# Altium PCB Altium LV Solo mission_PCB.PcbDoc
Units mm, origin at the board's own origin, x right, y up, seen from the top; angles counter-clockwise.
Board outline 34.5 x 34 mm, 4 copper layers (L1(Signal), L2(GND), L3 (GND), Layer4(Signal)), stack 1.57 mm thick; 35 components, 27 nets, 169 pads, 116 vias.
Unrouted connection lines stored in the file: 30.
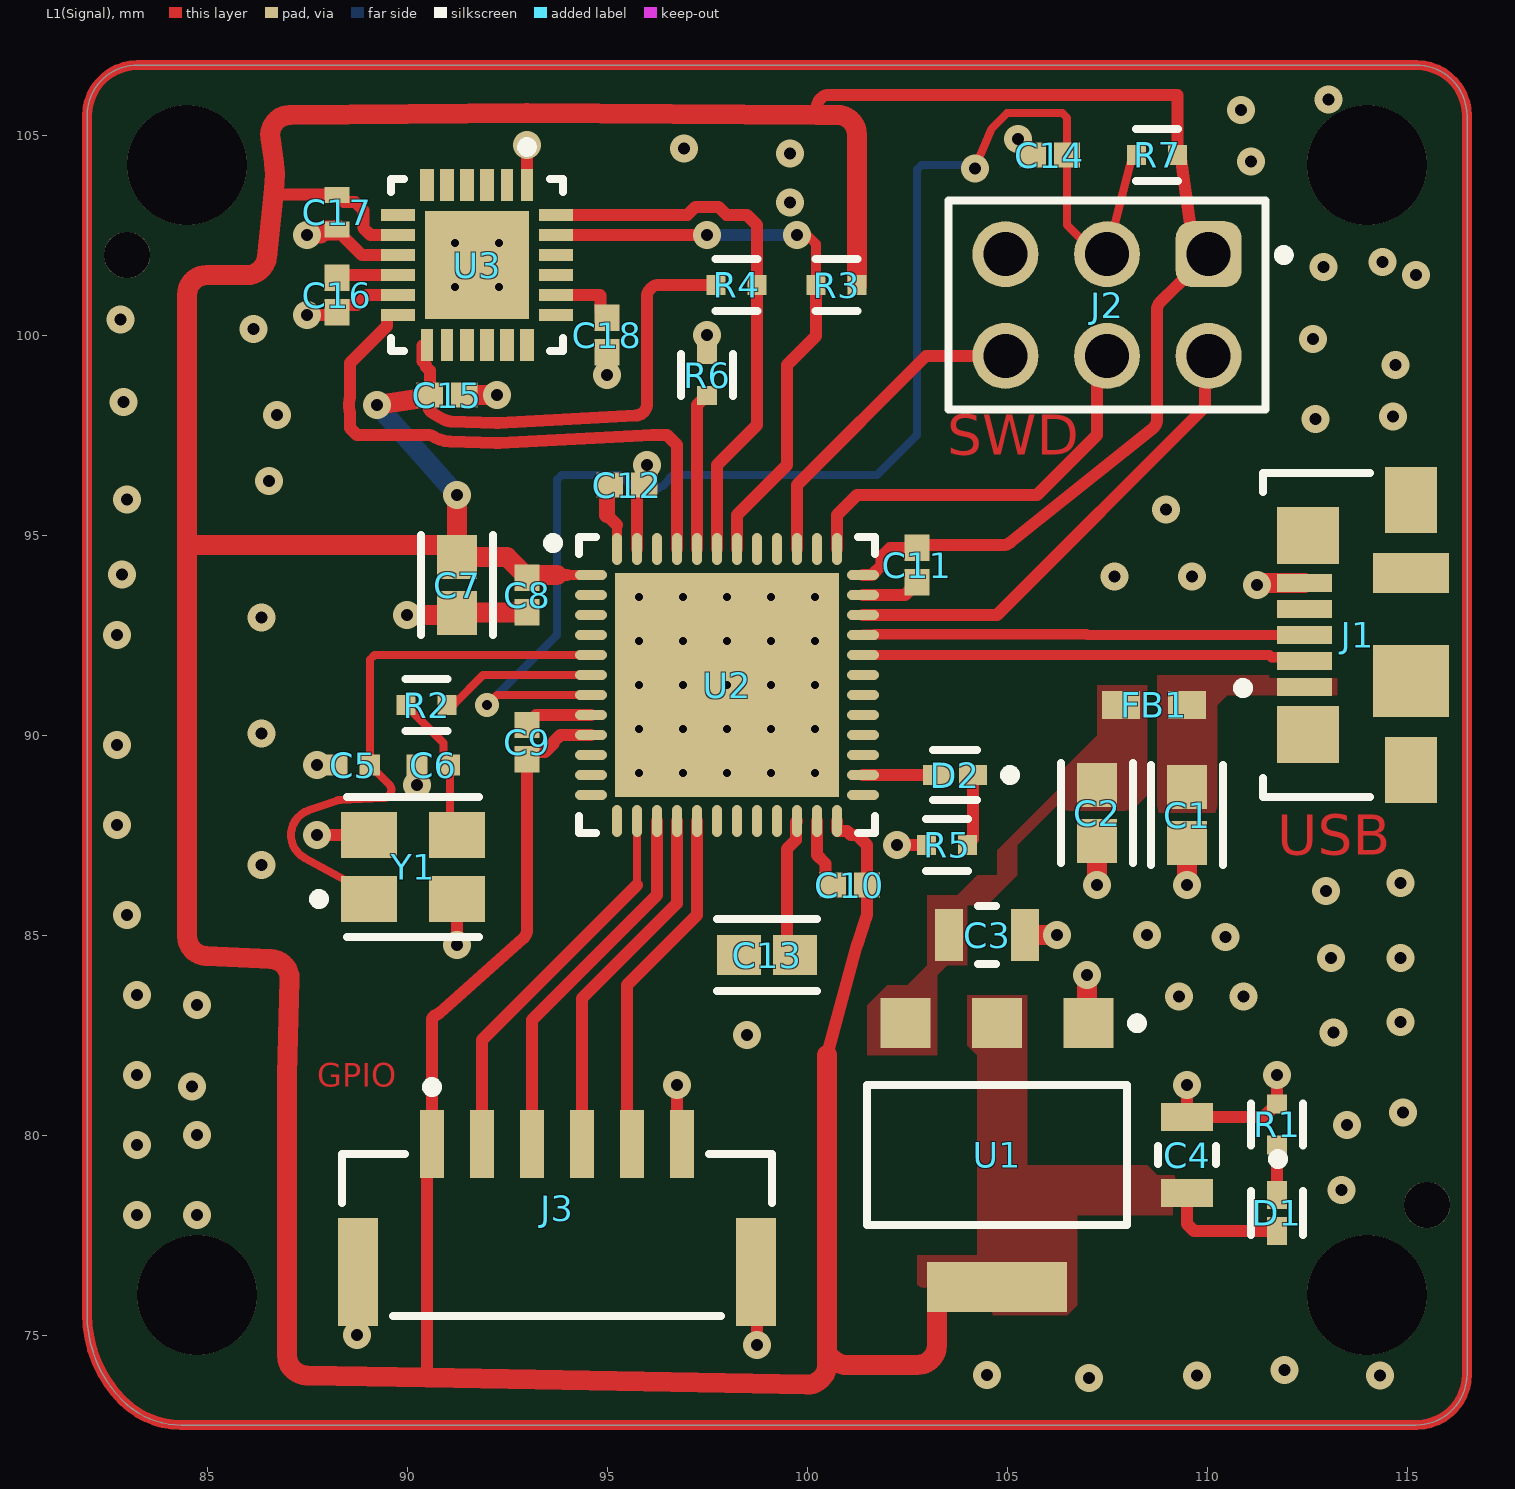
[diagram p0: L1(Signal) view]
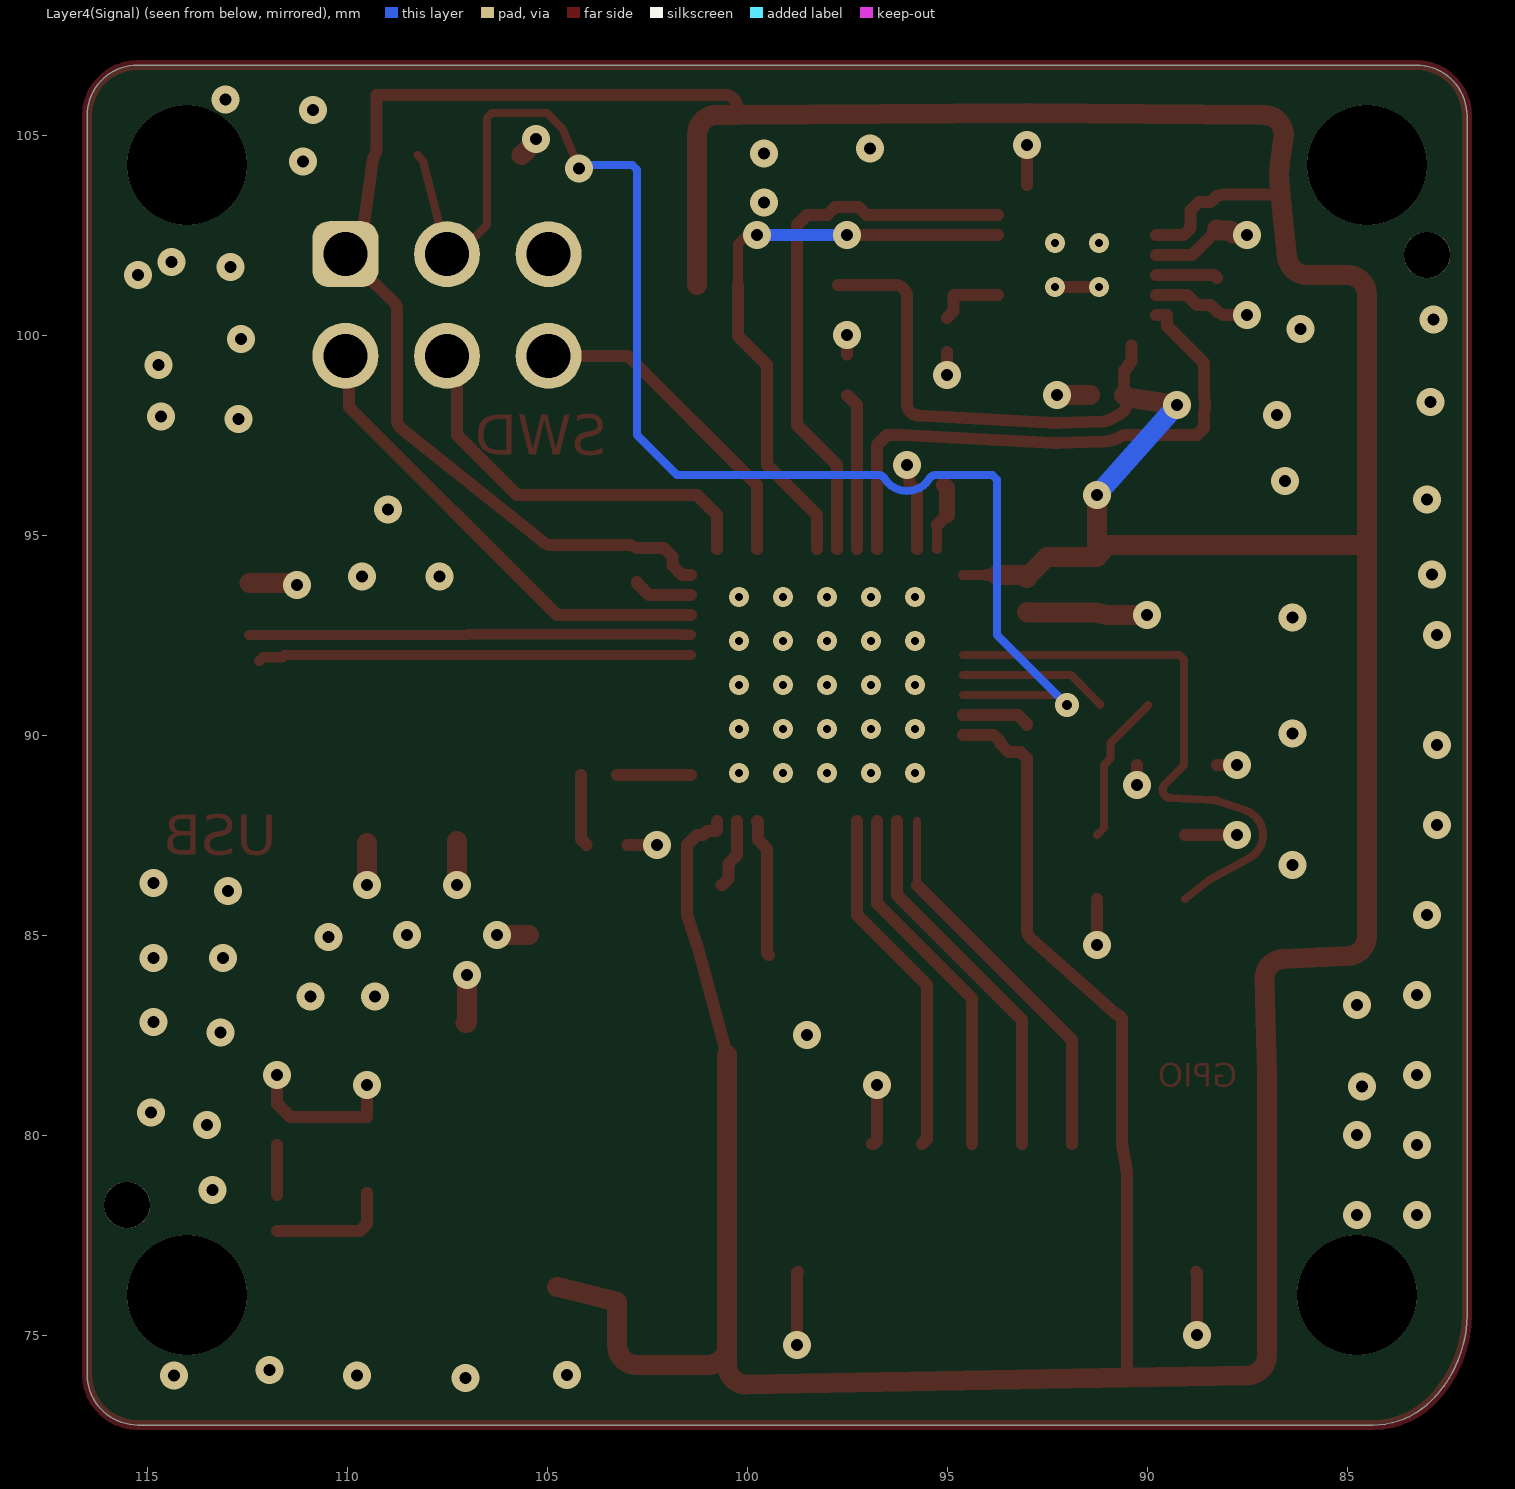
[diagram p1: Layer4(Signal) view, seen from below]
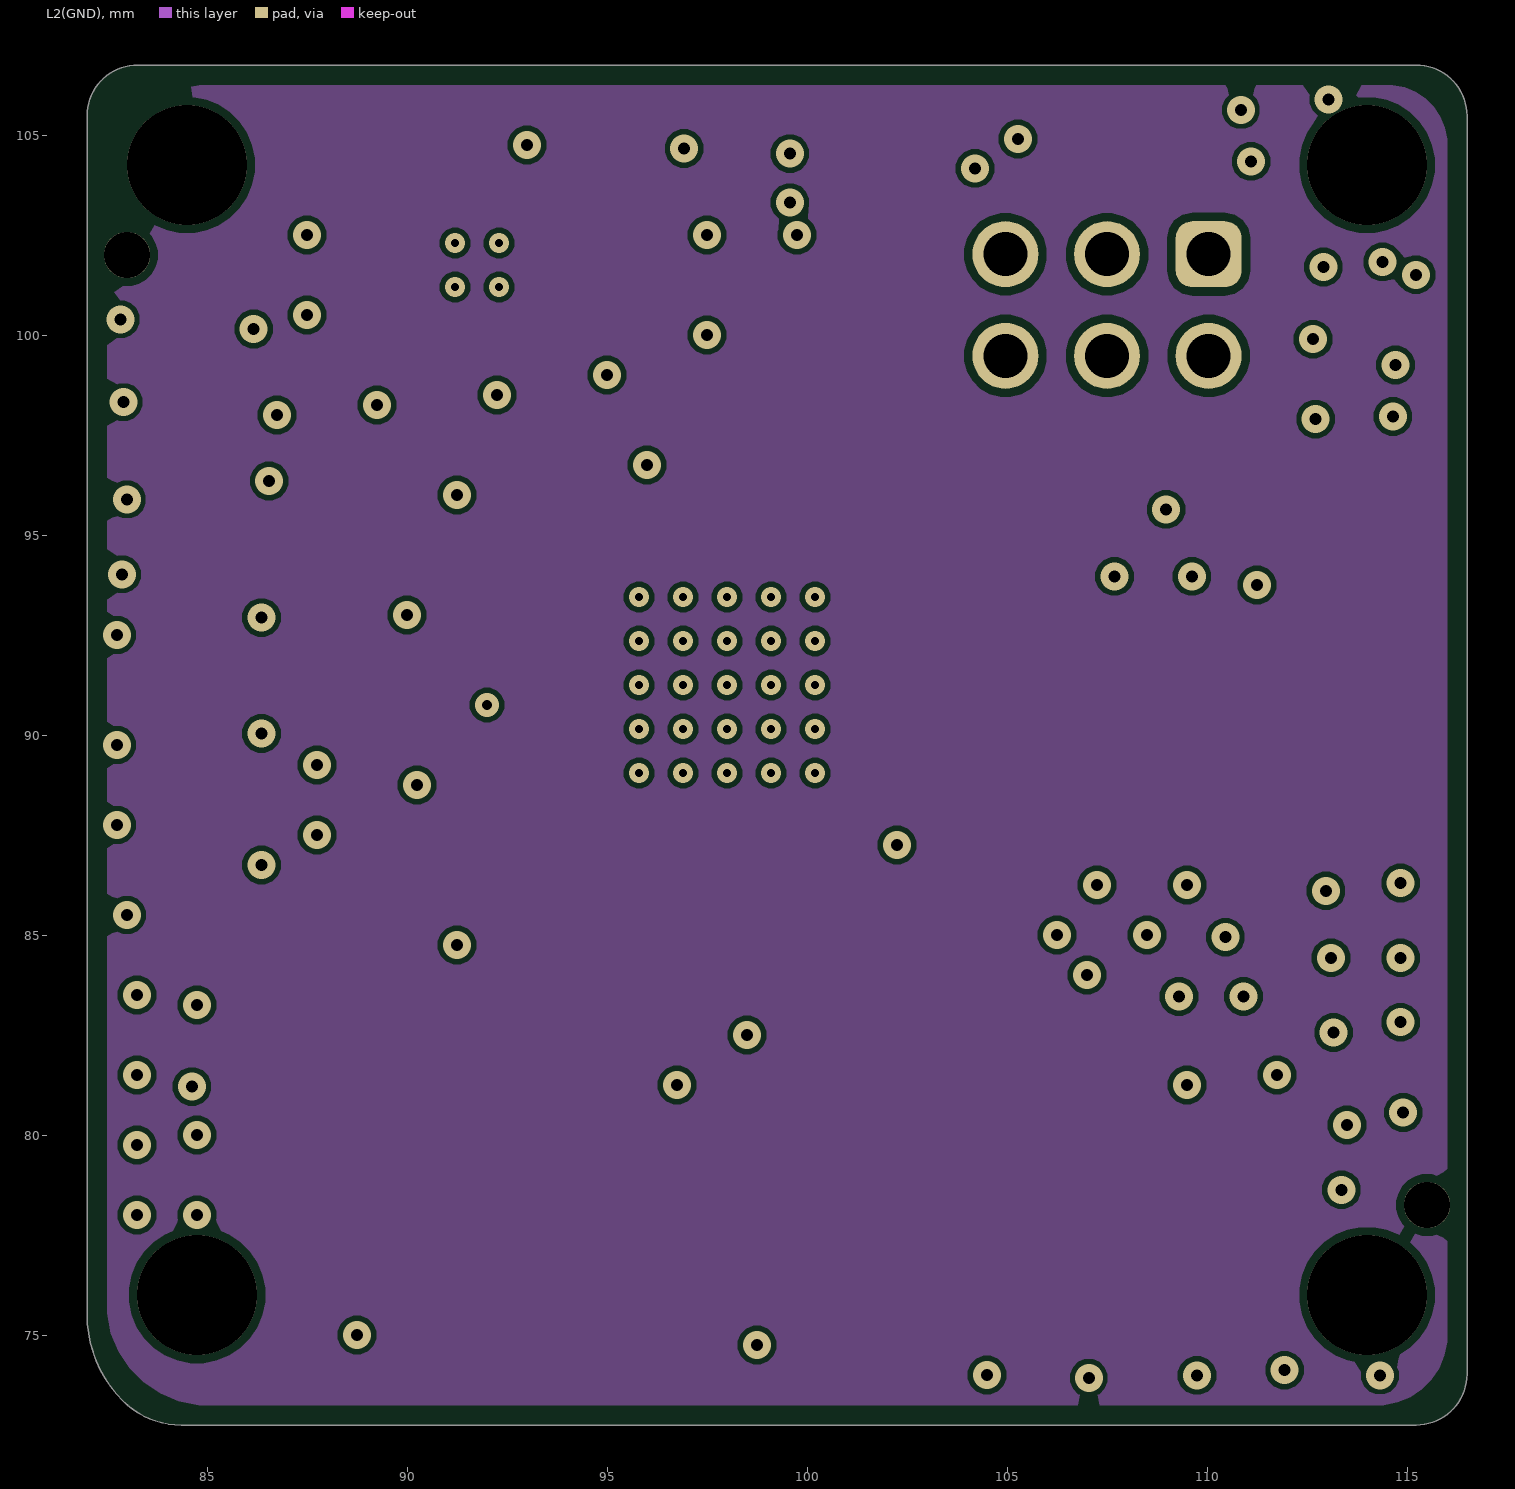
[diagram p2: L2(GND)]
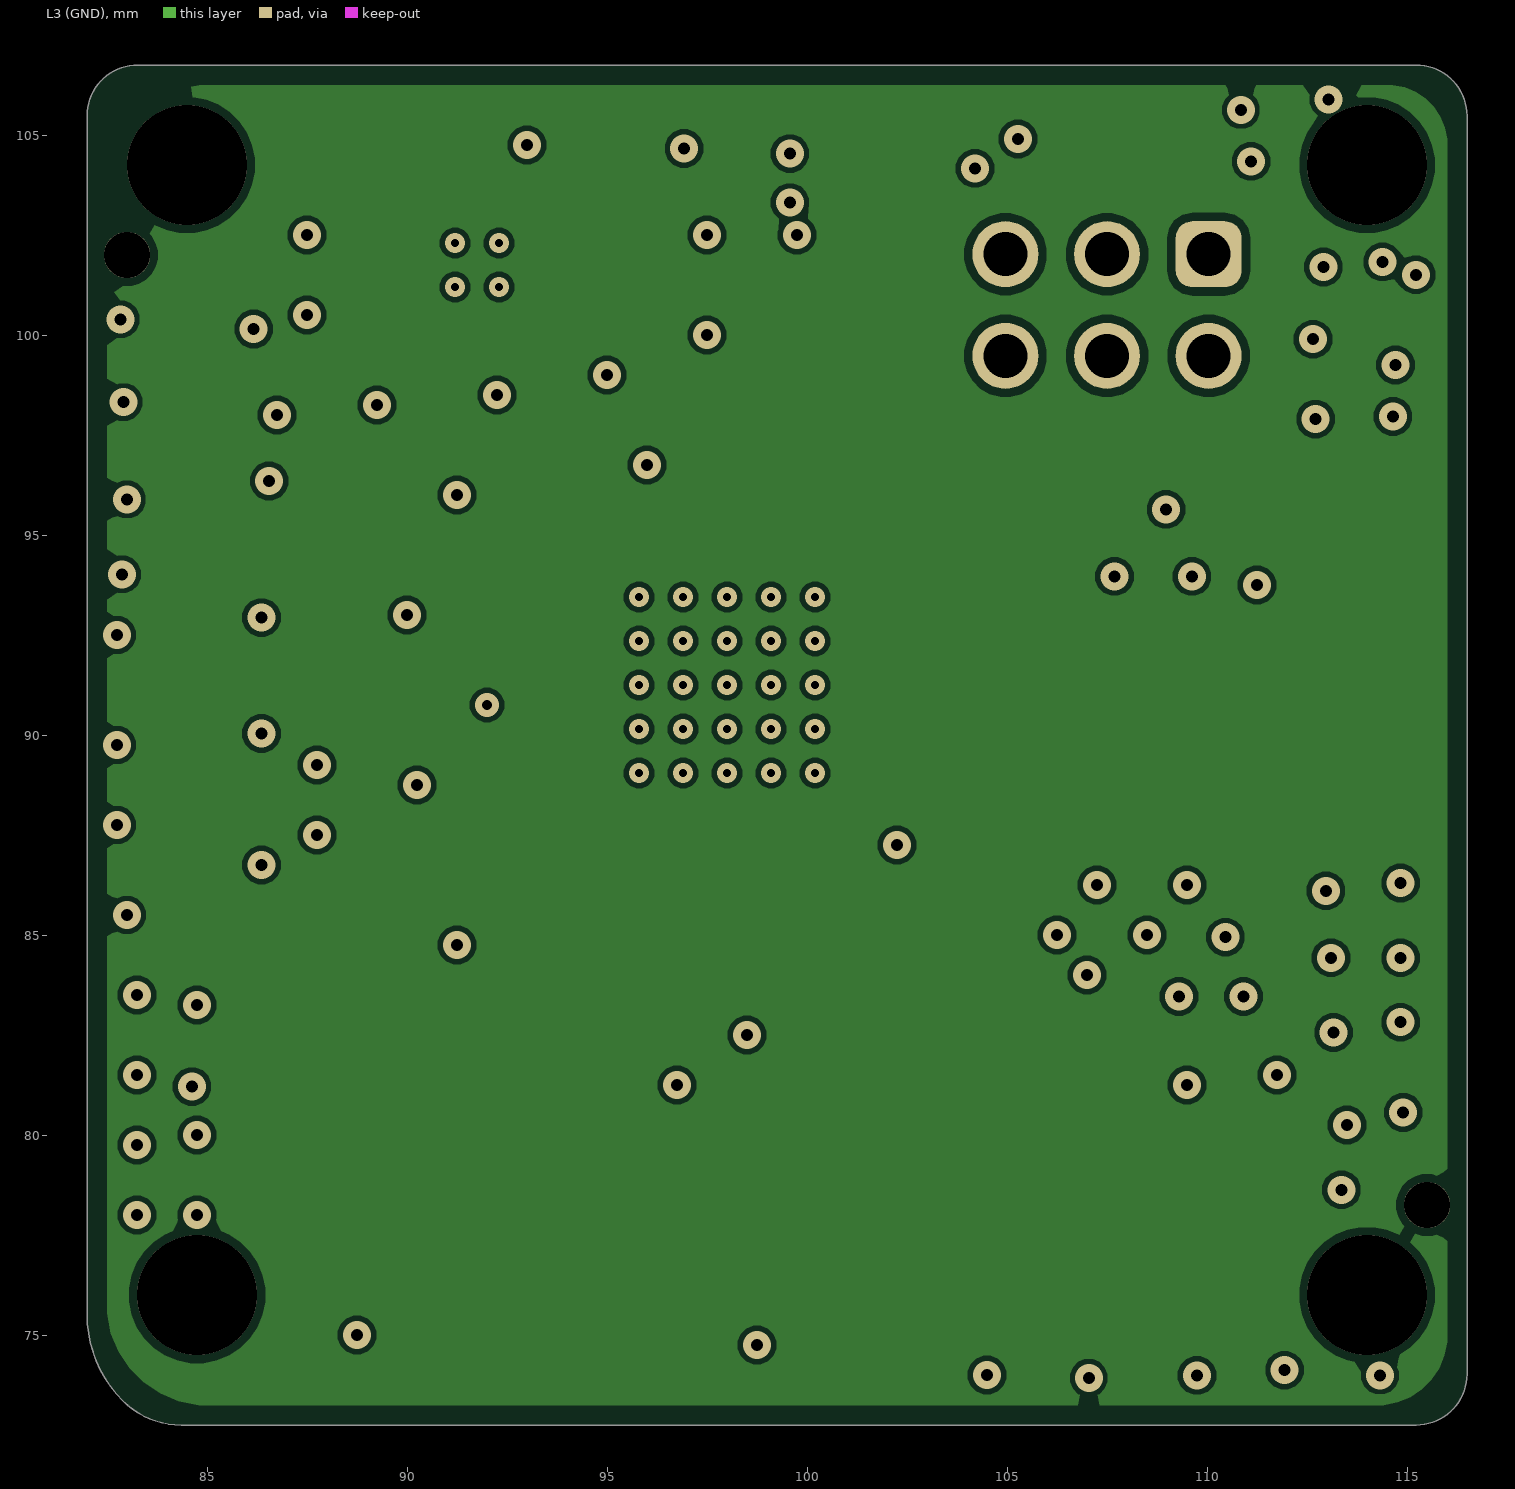
[diagram p3: L3 (GND)]
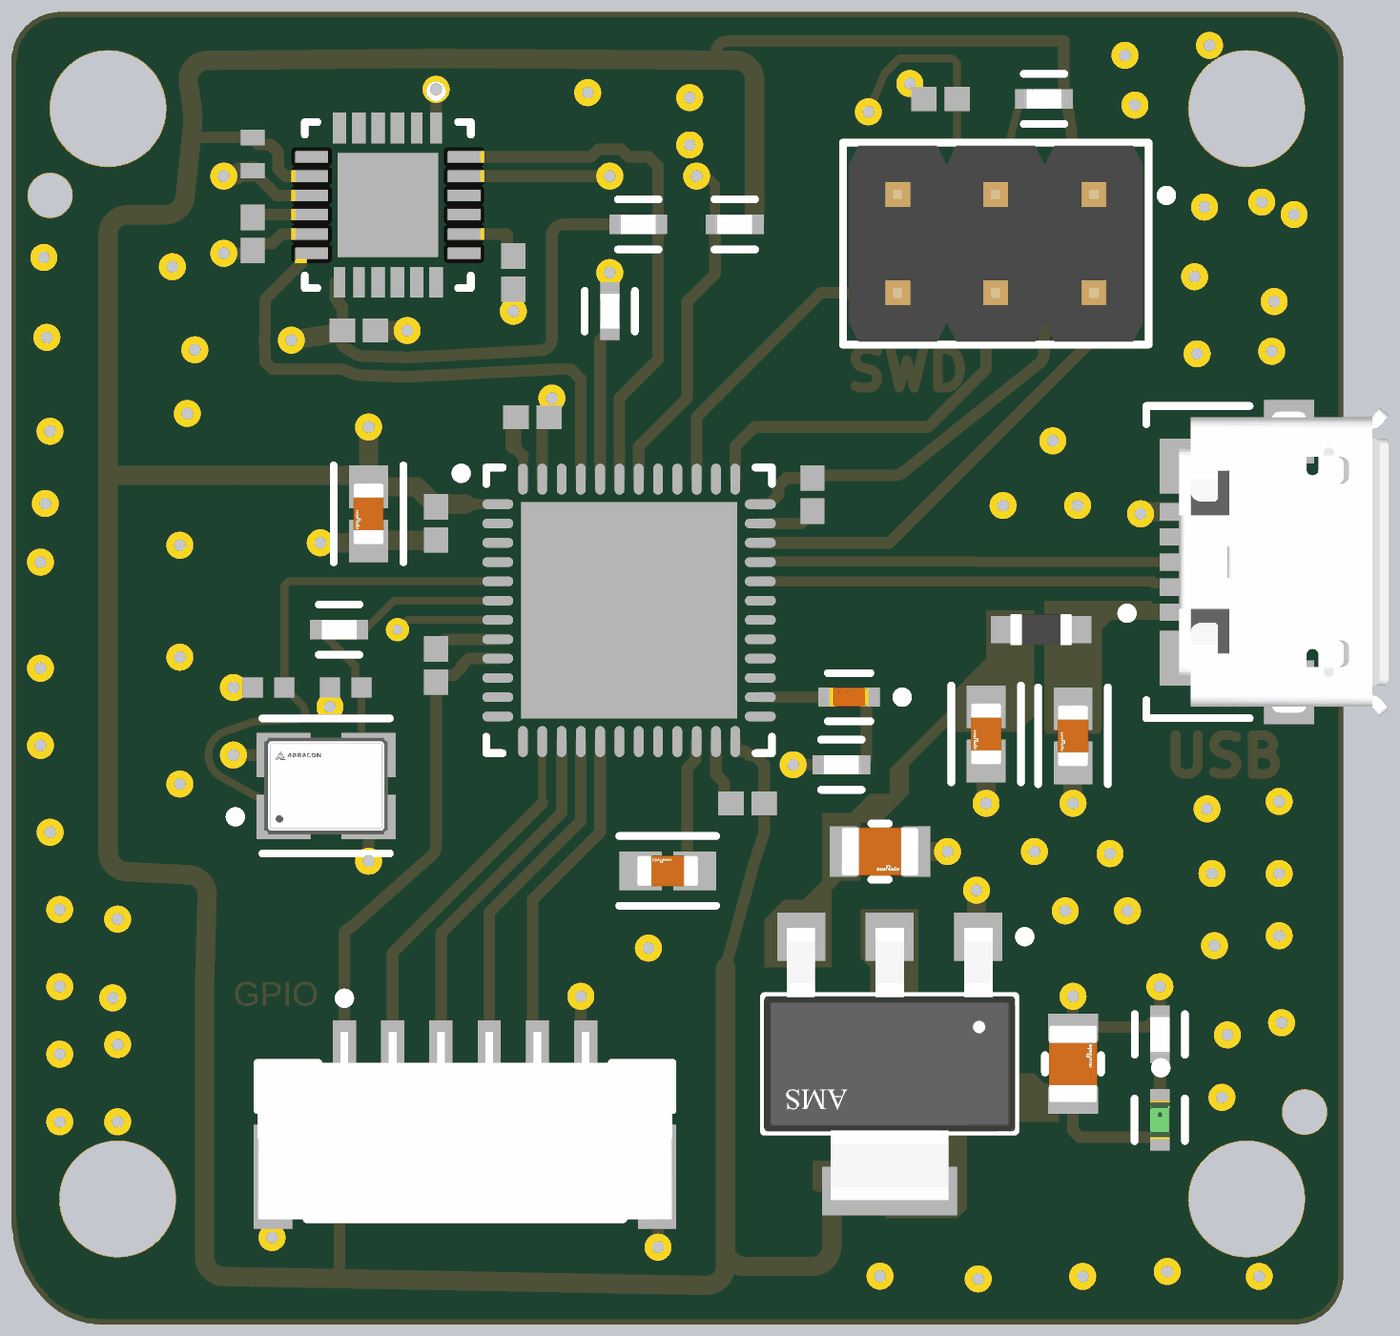
[diagram p4: 3D render of the assembled board from above, using the file's embedded part models]

## Layer stack, top to bottom
Top Solder: solder mask 0.0254, SM-001, Dk 4
L1(Signal): signal copper 0.035
Dielectric 1: prepreg 0.2, PP-017, Dk 4.6
L2(GND): signal copper 0.0175
Dielectric 3: core 1.065, Core-039, Dk 4.6
L3 (GND): signal copper 0.0175
Dielectric 5: prepreg 0.2, PP-017, Dk 4.6
Layer4(Signal): signal copper 0.035
Bottom Solder: solder mask 0.0254, SM-001, Dk 4

## Board outline
82.898,73.352 cw(c85.066,75.52) 82,75.52 82,105.48 cw(c83.27,105.48) 83.27,106.75 115.23,106.75 cw(c115.23,105.48) 116.5,105.48 116.5,74.02 cw(c115.23,74.02) 115.23,72.75 84.351,72.75 cw(c84.351,74.805)

## Design rules (kind name [scope] priority, off if disabled: settings)
Clearance [All] p1: gap=0.2 ignorepadtopadclearanceinfootprint=FALSE except(0.127: Via-Via Via-Fill Via-Poly Via-Region Via-Text Via-Hole)
DiffPairsRouting [All] p1: maxlimit=0.254 minlimit=0.203 mostfreqgap=0.254 toplayer_maxgap=0.203 toplayer_prefgap=0.203 toplayer_minwidth=0.26 toplayer_maxwidth=0.26 toplayer_prefwidth=0.26 bottomlayer_maxgap=0.203 bottomlayer_prefgap=0.203 bottomlayer_minwidth=0.26 bottomlayer_maxwidth=0.26 bottomlayer_prefwidth=0.26 impedanceprofiledriven=TRUE impedanceprofileid={98E42FFE-7671-4192-B65D-7246090C81C0} impedanceprofilevalue=90.000000 maxuncoupledlength=12.7
PolygonConnect [All] p1: connectstyle=Direct reliefconductorwidth=0.254 reliefentries=4 polygonreliefangle="90 Angle" airgapwidth=0.254
RoutingVias [All] p1: holewidth=0.3 width=0.7 viastyle="Through Hole" minholewidth=0.25 minwidth=0.55 maxholewidth=0.4 maxwidth=0.9
SolderMaskExpansion [All] p1: expansion=0 istentingtop=FALSE
SupplyNets "Schematic Supply Nets_3" [InNet('VBUS')] p1: voltage=0.000
SupplyNets "Schematic Supply Nets_2" [InNet('+3V3')] p2: voltage=0.000
SupplyNets "Schematic Supply Nets_1" [InNet('GND')] p3: voltage=0.000
SupplyNets "Schematic Supply Nets" [InNet('+5')] p4: voltage=0.000
UnRoutedNet [All] p1: checkbadconnections=TRUE
Width [All] p1: maxlimit=1 minlimit=0.2 preferedwidth=0.3 midlayer1_minwidth=0.254 midlayer1_maxwidth=0.254 midlayer1_prefwidth=0.254 midlayer2_minwidth=0.254 midlayer2_maxwidth=0.254 midlayer2_prefwidth=0.254 minimp=50.000000 maximp=50.000000 favimp=50.000000
28 further rules are at their usual default settings.

## Classes and differential pairs
differential pair class DIFF_USB: USB_D
differential pair USB_D: +USB_D_P -USB_D_N

## Components (designator, comment, footprint, x,y, rotation, side; value= is the part's Value field where it differs from the comment)
C1 "2u2" FP-GRM188-0_2-IPC_B 109.5,88 r270 top
C2 "2u2" FP-GRM188-0_2-IPC_B 107.25,88.049 r270 top
C3 "22u" FP-GRM21B-0_2-e0_2_0_7-MFG 104.5,85 r0 top
C4 "22u" FP-GRM21B-0_2-e0_2_0_7-MFG 109.5,79.5 r90 top
C5 "10p" CAPC1005X55X25LL05T05 88.66,89.25 r0 top
C6 "10p" CAPC1005X55X25LL05T05 90.66,89.25 r0 top
C7 "2u2" FP-GRM188-0_2-IPC_B 91.25,93.75 r270 top
C8 "100n" CAPC1005X55X30NL05T10#1 93,93.5 r270 top
C9 "100n" CAPC1005X55X30NL05T10#1 93,89.82 r90 top
C10 "100n" CAPC1005X55X30NL05T10#1 101.07,86.25 r180 top
C11 "100n" CAPC1005X55X30NL05T10#1 102.75,94.25 r270 top
C12 "100n" CAPC1005X55X30NL05T10#1 95.5,96.25 r0 top
C13 "2u2" FP-GRM188-0_2-IPC_B 99,84.5 r180 top
C14 "100n" CAPC1005X55X30NL05T10#1 106.07,104.5 r180 top
C15 "100n" CAPC1005X55X30NL05T10#1 91,98.5 r0 top
C16 "100n" CAPC1005X55X30NL05T10#1 88.25,101 r270 top
C17 "10n" CAPC1005X55X30NL05T10#2 88.25,103.07 r270 top
C18 "2n2" CAPC1005X55X30NL05T10#1 95,100 r270 top
D1 "" FP-APG1005CGC-T-MFG 111.75,78.05 r270 top
D2 "APHHS1005SURCK" FP-APHHS1005SURCK-MFG 103.7,89 r180 top
FB1 "120R" "WE-CBF HF_0603_HC" 108.675,90.75 r180 top
J1 "473460001" FP-473460001-MFG 114.75,92.5 r90 top
J2 "DNP" 61300621121 107.5,100.75 r180 top
J3 "SM06B-GHS-TB(LF)(SN)" FP-SM06B-GHS-TB_LF_SN-MFG 93.75,77.5 r0 top
R1 "1k" FP-CR0402-MFG 111.75,80.263 r270 top
R2 "0R" FP-CR0402-MFG 90.488,90.75 r180 top
R3 "2k2" FP-CR0402-MFG 100.738,101.25 r0 top
R4 "2k2" FP-CR0402-MFG 98.238,101.25 r180 top
R5 "1k" FP-CR0402-MFG 103.5,87.25 r0 top
R6 "10k" FP-CR0402-MFG 97.5,99 r270 top
R7 "10k" FP-CR0402-MFG 108.75,104.5 r0 top
U1 "AMS1117-3.3" FP-AMS1117-IPC_C 104.75,79.5 r270 top
U2 "STM32F411CEU6" STM-UFQFPN48_L 98,91.25 r0 top
U3 "MPU-6050" IS-QFN-24_V 91.75,101.75 r270 top
Y1 "24MHz" FP-ABM8W-MFG 90.15,86.7 r0 top

## Footprints (in the part's own frame and the unit in brackets; to place one, negate y for a bottom-side part, rotate by r counter-clockwise, add the part's x,y. Pads: shape width x height; smd on the part's side, far side on the other; paste and mask are expansions set on the pad)
61300621121 [mm] "Pin Header, pitch 2.54 mm, THT, Vertical, dual row, 6p"
  rrect50% 1.65x1.65 hole 1.1: 1(-2.54,-1.27)
  round 1.65 hole 1.1: 2(-2.54,1.27) 3(0,-1.27) 4(0,1.27) 5(2.54,-1.27) 6(2.54,1.27)
  silkscreen extent -4.54,-2.62 3.96,2.62, body extent -3.81,-2.54 3.81,2.54, height 8.59
CAPC1005X55X25LL05T05 [mm] "Chip Capacitor, 2-Leads, Body 1.00x0.50mm, IPC High Density"
  rect 0.52x0.52 smd: 1(-0.41,0) 2(0.41,0)
  body extent -0.53,-0.28 0.53,0.28, height 0.55
CAPC1005X55X30NL05T10#1 [mm] "Chip Capacitor, 2-Leads, Body 1.00x0.50mm, IPC Medium Density"
  rect 0.66x0.62 smd: 1(-0.43,0) 2(0.43,0)
  body extent -0.53,-0.28 0.53,0.27, height 0.55
CAPC1005X55X30NL05T10#2 [mm] "Chip Capacitor, 2-Leads, Body 1.00x0.50mm, IPC Medium Density"
  rect 0.4x0.62 smd: 1(-0.43,0) 2(0.43,0)
  body extent -0.53,-0.28 0.53,0.27, height 0.55
FP-473460001-MFG [mm]
  rect 0.45x1.38 smd paste+0 mask+0: 1(-1.3,2.31) 2(-0.65,2.31) 3(0,2.31) 4(0.65,2.31) 5(1.3,2.31)
  rect 1.425x1.55 smd paste+0 mask+0: 6(-2.488,2.225) 7(2.488,2.225)
  rect 1.65x1.3 smd paste+0 mask+0: 8(-3.375,-0.35) 11(3.375,-0.35)
  rect 1.8x1.9 smd paste+0 mask+0: 9(-1.15,-0.35)
  rect 1x1.9 smd paste+0 mask+0: 10(1.55,-0.35)
  silkscreen extent -4.05,0.67 4.05,3.97, body extent -4.3,-2.48 4.3,3.45, height 0.25
FP-ABM8W-MFG [mm]
  rect 1.4x1.15 smd paste+0 mask+0: 1(-1.1,-0.8) 2(1.1,-0.8) 3(1.1,0.8) 4(-1.1,0.8)
  silkscreen extent -2.47,-1.75 1.65,1.75, body extent -1.9,-1.48 1.9,1.48, height 0.25
FP-AMS1117-IPC_C [mm]
  rect 1.25x1.25 smd paste+0 mask+0: 1(-3.295,2.29) 2(-3.295,0) 3(-3.295,-2.29)
  rect 1.25x3.5 smd paste+0 mask+0: 4(3.295,0)
  silkscreen extent -3.42,-3.25 1.75,3.63, body extent -3.9,-3.35 3.9,3.35, height 0.25
FP-APG1005CGC-T-MFG [mm]
  rect 0.7x0.5 smd paste+0 mask+0: 1(-0.45,0) 2(0.45,0)
  silkscreen extent -1.47,-0.65 0.55,0.65, body extent -0.9,-0.4 0.9,0.4, height 0.25
FP-APHHS1005SURCK-MFG [mm]
  rect 0.7x0.5 smd paste+0 mask+0: 1(-0.45,0) 2(0.45,0)
  silkscreen extent -1.5,-0.63 0.55,0.63, body extent -0.9,-0.4 0.9,0.4, height 0.25
FP-CR0402-MFG [mm]
  rect 0.475x0.5 smd paste+0 mask+0: 1(-0.512,0) 2(0.513,0)
  silkscreen extent -0.53,-0.65 0.53,0.65, body extent -0.85,-0.38 0.85,0.38, height 0.25
FP-GRM21B-0_2-e0_2_0_7-MFG [mm]
  rect 0.7x1.3 smd paste+0 mask+0: 1(-0.95,0) 2(0.95,0)
  silkscreen extent -0.23,-0.72 0.23,0.72, body extent -1.4,-0.82 1.4,0.82, height 0.25
FP-GRM188-0_2-IPC_B [mm]
  rect 1.105x1.006 smd paste+0 mask+0: 1(-0.701,0) 2(0.701,0)
  silkscreen extent -1.25,-0.9 1.25,0.9, body extent -1.5,-0.75 1.5,0.75, height 0.25
FP-SM06B-GHS-TB_LF_SN-MFG [mm]
  rect 0.6x1.7 smd paste+0 mask+0: 1(-3.125,2.275) 2(-1.875,2.275) 3(-0.625,2.275) 4(0.625,2.275) 5(1.875,2.275) 6(3.125,2.275)
  rect 1x2.7 smd paste+0 mask+0: 7(-4.975,-0.925) 8(4.975,-0.925)
  silkscreen extent -5.38,-2.02 5.38,3.82, body extent -5.58,-2.37 5.58,3.22, height 0.25
IS-QFN-24_V [mm] "QFN, 24-Leads, Body 4x4mm, Pitch 0.5mm, Thermal Pad 2.7x2.6mm"
  rect 0.8x0.3 smd: 1(-2,1.25) 2(-2,0.75) 13(2,-1.25) 14(2,-0.75)
  rect 0.8x0.35 smd: 3(-2,0.25) 4(-2,-0.25) 5(-2,-0.75) 6(-2,-1.25) 15(2,-0.25) 16(2,0.25) 17(2,0.75) 18(2,1.25)
  rect 0.3x0.85 smd mask+0.102: 7(-1.25,-1.975) 8(-0.75,-1.975) 9(-0.25,-1.975) 10(0.25,-1.975) 11(0.75,-1.975) 12(1.25,-1.975) 19(1.25,1.975) 20(0.75,1.975) 21(0.25,1.975) 22(-0.25,1.975) 23(-0.75,1.975) 24(-1.25,1.975)
  rect 2.7x2.6 smd: 25(0,0)
  silkscreen extent -3.07,-2.15 2.15,2.15, body extent -2,-2 2,2, height 0.95
STM-UFQFPN48_L [mm] "QFN, 48-Leads, Body 7.1x7.1mm, Pitch 0.5mm, Thermal Pad 5.6x5.6mm, IPC High Density"
  oval 0.8x0.25 smd: 1(-3.4,2.75) 2(-3.4,2.25) 3(-3.4,1.75) 4(-3.4,1.25) 5(-3.4,0.75) 6(-3.4,0.25) 7(-3.4,-0.25) 8(-3.4,-0.75) 9(-3.4,-1.25) 10(-3.4,-1.75) 11(-3.4,-2.25) 12(-3.4,-2.75) 25(3.4,-2.75) 26(3.4,-2.25) 27(3.4,-1.75) 28(3.4,-1.25) 29(3.4,-0.75) 30(3.4,-0.25) 31(3.4,0.25) 32(3.4,0.75) 33(3.4,1.25) 34(3.4,1.75) 35(3.4,2.25) 36(3.4,2.75)
  oval 0.25x0.8 smd: 13(-2.75,-3.4) 14(-2.25,-3.4) 15(-1.75,-3.4) 16(-1.25,-3.4) 17(-0.75,-3.4) 18(-0.25,-3.4) 19(0.25,-3.4) 20(0.75,-3.4) 21(1.25,-3.4) 22(1.75,-3.4) 23(2.25,-3.4) 24(2.75,-3.4) 37(2.75,3.4) 38(2.25,3.4) 39(1.75,3.4) 40(1.25,3.4) 41(0.75,3.4) 42(0.25,3.4) 43(-0.25,3.4) 44(-0.75,3.4) 45(-1.25,3.4) 46(-1.75,3.4) 47(-2.25,3.4) 48(-2.75,3.4)
  rect 5.6x5.6 smd: 49(0,0)
  silkscreen extent -4.47,-3.7 3.7,3.7, body extent -3.55,-3.55 3.55,3.55, height 0.6
"WE-CBF HF_0603_HC" [mm] "SMD EMI Suppression Ferrite  Bead, body 1.60x0.80mm"
  rect 0.95x0.7 smd: 1(-0.825,0) 2(0.825,0)
  body extent -0.8,-0.4 0.8,0.4, height 0.8

## Part data
C1 C2 C7 C13: library part CMP-06035-000124-3, "CAP CER 2.2UF 16V X7S 0603", Capacitance=2.2uF, Case Code (Imperial)=0603, Case Code (Metric)=1608, Dielectric=X7S, Max Operating Temperature=125°C, Min Operating Temperature=-55°C, Package Quantity=4000, Resistor Type=Ceramic, Tolerance=10%, Voltage Rating=16V, Case/Package=0603, Depth=0.8mm, Height=0.8mm, Length=1.6mm, Mount="Surface Mount", Packaging="Tape and Reel", Termination=SMD/SMT, Thickness=0.039inch, Voltage Rating (DC)=16V, Weight=0.000222oz, Width=0.031inch
C3 C4: library part CMP-06035-012913-1, "Chip Multilayer Ceramic Capacitors for General Purpose, 0805, 22uF, X6S, 22%, 20%, 16V", Capacitance=22uF, Case Code (Imperial)=0805, Case Code (Metric)=2012, Dielectric=X6S, Max Operating Temperature=105°C, Min Operating Temperature=-55°C, Package Quantity=3000, Tolerance=20%, Voltage Rating=16V, Case/Package=0805, Height=1.25mm, Lead Free="Lead Free", Length=0.079inch, Mount="Surface Mount", Packaging="Tape and Reel", Termination=SMD/SMT, Thickness=0.057inch, Voltage Rating (DC)=16V, Weight=0.000335oz, Width=1.25mm
C5 C6: library part CMP-2008-01462-1, Manufacturer=Vitramon, Part Number=VJ0402A100KXJCW1BC
C8 C9 C10 C11 C12 C14 C15 C16 C17 C18: library part CMP-2008-03085-1, Manufacturer=Kemet, Part Number=C0402C104K4RALTU
D1: library part CMP-44529-000029-1, "LED GREEN CLEAR CHIP SMD", Case Code (Imperial)=0402, Case Code (Metric)=1005, Color=Green, Forward Voltage=2V, Lens Color=Colorless, Package Quantity=1, Test Current=20mA, Case/Package=0402, Dominant Wavelength=571nm, Height=0.25mm, Lead Free="Lead Free", Length=1mm, Lens Transparency=Clear, Luminous Intensity=35mcd, Mount="Surface Mount", Packaging="Tape and Reel", Viewing Angle=120°, Width=0.5mm
D2: library part CMP-2000-05787-2, "LED RED CLEAR CHIP SMD", Case Code (Imperial)=0402, Case Code (Metric)=1005, Color=Red, Forward Current=20mA, Forward Voltage=1.95V, Lens Color=Clear, Max Operating Temperature=85°C, Min Operating Temperature=-40°C, Package Quantity=2000, Case/Package=0402, Dominant Wavelength=630nm, Height=0.6mm, Illumination Color=Red, Lead Free="Lead Free", Length=1mm, Lens Style=Clear, Luminous Intensity=220mcd, Mount="Surface Mount", Number of LEDs=1, Number of Pins=2, Packaging="Tape and Reel", Test Current=20mA, Viewing Angle=120°, Wavelength=635nm, Width=0.5mm
FB1: library part CMP-0220-00101-3, "Ferrite Bead (emi Suppression), 1.6X0.8X0.8MM (0603), 600O Impedance At 100 Mhz", Case Code (Imperial)=0603, Case Code (Metric)=1608, Case/Package=SMD/SMT, Current Rating=400mA, DC Resistance (DCR)=220mΩ, Max Current Rating=500mA, Max Operating Temperature=125°C, Min Operating Temperature=-55°C, Resistance=350mΩ, Test Frequency=100MHz, Tolerance=25%, Core Material=Ferrite, Depth=800µm, Height=800µm, Impedance=600Ω, Lead Free="Lead Free", Length=1.6mm, Max DC Current=500mA, Mount="Surface Mount", Number of Lines=1, Number of Pins=2, REACH SVHC=Unknown, RoHS=Compliant, Termination=SMD/SMT, Width=800µm
J1: library part CMP-2000-05246-2, "CONN RCPT USB2.0 MICRO B SMD R/A", Current Rating=1.8A, Manufacturer=Molex, Package=0, Temperature="-30°C to +85°C", Temperature Range High=+85°C, Temperature Range Low=-30°C, Voltage Rating=30V, Automotive=No, Category=Conn, ComponentLink2Description=Datasheet, ComponentLink2URL=https://www.molex.com/webdocs/datasheets/pdf/en-us/0473460001_IO_CONNECTORS.pdf, Conn Orientation="Right Angle", Contact Material=Gold,Nickel, Device Class L1=Connectors, Device Class L2="USB Connectors", Device Class L3=unset, Digikey Description="CONN RCPT USB2.0 MICRO B SMD R/A", Footprint Url=https://www.molex.com/pdm_docs/sd/473460001_sd.pdf, Height=2.945mm, Is Female=yes, Lead Free=Yes, Manufacturer Part Number=473460001, Number Of Contacts=5, Octopart=https://octopart.com/47346-0001-molex-7164928, Pitch=0.65mm, RoHS=TRUE, Shielding=true, Usb Standard="USB 2.0"
J2: library part CMP-1502-01072-4, "THT Vertical Pin Header WR-PHD, Pitch 2.54 mm, Dual Row, 6 pins", Color=Black, Contact Resistance=20mΩ, Current Rating=3A, Max Operating Temperature=105°C, Min Operating Temperature=-40°C, Operating Supply Voltage=250V, Connector Type="Male Pin", Contact Material=Gold, Contact Mating Length=5.9944mm, Contact Plating=Gold, Gender=Male, Height=8.89mm, Lead Pitch=2.54mm, Mount="Through Hole", Number Of Contacts=6, Number of Pins=6, Number of Positions=6, Number of Rows=2, Orientation=Vertical, Packaging=Bulk, Pitch=2.54mm, RoHS=Compliant, Row Spacing=2.54mm, Termination=Solder, Voltage Rating=250V
J3: library part CMP-17439-000061-1, "CONN HEADER SMD R/A 6POS 1.25MM", Color=Natural, Contact Resistance=50mR, Current Rating=1A, Housing Color=Beige, Max Operating Temperature=85°C, Max Voltage Rating (AC)=50V, Min Operating Temperature=-25°C, Connector Type="Outer Shroud Contact", Contact Material=Bronze, Contact Plating=Tin, Depth=4.05mm, Fastening Type=Ramp, Housing Material=Polyamide, Lead Free="Lead Free", Length=10.75mm, Max Current Rating=1A, Mount="Surface Mount", Number Of Contacts=6, Number of Positions=6, Number of Rows=1, Orientation="Right Angle", Packaging="Tape and Reel", Pitch=1.25mm, Termination=Solder, Voltage Rating=50V
R1 R2 R3 R4 R5 R6 R7: library part CMP-07231-005993-1, "Sulfur-Resistant, AEC-Q200 Compliant Chip Resistors 0402 10kΩ 0.063W 1% 100ppm/°C"
U1: library part CMP-209535-000001-1, "LDO Voltage Regulators 1A, 3.3V", Dropout Voltage=1.1V, Manufacturer="Advanced Monolithic Systems", Max Junction Temp=+125°C, Max Power Dissipation=1.2W, Max Supply Voltage=15V, Nominal Supply Current=5mA, Output Current=1A, Output Voltage=3.3V, Package=AMS1117, Temperature="-40°C to +125°C", Temperature Range Low=-40°C, Automotive=No, Category=IC, ComponentLink2Description=Datasheet, ComponentLink2URL=http://www.advanced-monolithic.com/pdf/ds1117.pdf, Device Class L1="Integrated Circuits (ICs)", Device Class L2="Power Management ICs", Device Class L3="Voltage Regulators - Linear", Height=1.8mm, Ipc Land Pattern Name=SOT229P700X180-4, Lead Free=Yes, Manufacturer Part Number=AMS1117-3.3, Number Of Outputs=1, Octopart=https://octopart.com/ams1117-3.3-advanced+monolithic+systems-25899300, Output Type=Fixed, RoHS=TRUE, Standoff Height=0.64mm, Temperature Range High=+125°C
U2: library part CMP-0243-00165-1, "ARM Cortex-M4 32-bit MCU+FPU, 512 KB Flash, 128 KB RAM, 36 I/Os, 48-Pin UFQFPN, -40 to 85 degC, Tray", I/Os (High Current)=36, Operating Frequency(F) (Processor speed) (MHz)=100, Package Description=UFQFPN48, Package Reference="48-Pin Ultra Thin Fine Pitch Quad Flat No-Lead, 7 x 7 x 0.6 mm Body, 0.5 mm Pitch, Exposed Pad", Supply Voltage(Vcc) min (V)=1.7, ComponentLink1Description="Manufacturer URL", ComponentLink1URL=http://www.st.com/, ComponentLink2Description=Datasheet, ComponentLink2URL=http://www.st.com/st-web-ui/static/active/en/resource/technical/document/datasheet/DM00115249.pdf, Core="ARM Cortex-M4", DatasheetVersion="Rev. 6", FLASH Size (Prog) (kB)=512, Internal RAM Size (kB)=128, Mounting Technology="Surface Mount", Packing=Tray
U3: library part CMP-1753-00002-2, "3-Axis Gyroscope, Accelerometer and a Digital Motion Processor(TM) (DMP), 2.375 to 3.46 V, -40 to 85 degC, 24-Pin QFN, RoHS, Tape and Reel", Manufacturer=InvenSense, Standard Package=5,000, Category=Sensors,Transducers, Datasheet URL=http://datasheet.octopart.com/MPU-6050-InvenSense-datasheet-14421344.pdf, Datasheet Version="Rev. 3.3, 05/2012", Dynamic Catalog=MPU-6000™Series, Family=Multifunction, Featured Product=MPU-60506-Axis,IntegratedI²CSolution, Manufacturer URL=http://www.invensense.com/, Online Catalog=MPU-6000™Series, Other Names="1428-1007-2 / MPU6050", Output Type=Digital, Sensor Type=MotionTracking, Unit PriceUSD=Digital
Y1: library part CMP-27762-013939-3, "Crystal 24MHz ±10ppm (Tol) ±10ppm (Stability) 7pF FUND 50Ω 4-Pin SMD T/R"

## Free pads (board coordinates)
  round 3 hole 3: MH(84.5,104.25) MH(84.75,76) MH(114,76) MH(114,104.25)
  round 1.152 hole 1.152: TH(83,102) TH(115.5,78.25)

## Via types
v1: diameter 0.7, hole 0.3, L1(Signal) to Layer4(Signal), 86 vias
v2: diameter 0.5, hole 0.2, L1(Signal) to Layer4(Signal), 29 vias
v3: diameter 0.6, hole 0.25, L1(Signal) to Layer4(Signal), 1 vias

## Nets (pads, with @x,y where several pads share a name; then routed paths per layer and width w, separated by ;. In a path a pad name is that pad's centre, name@x,y a point inside that pad or via, vN(x,y) a via of type N, cw(c..) or ccw(c..) an arc to the next point about the centre after c; other vN are vias at no path point)
+3V3: C4.1 C7.1 C8.1 C9.1 C10.1 C11.1 C12.1 C15.1 C17.1 D1.2 J2.1 J3.1 R3.2 R4.2 R7.2 U1.2 U1.4 U2.1 U2.9 U2.24 U2.36 U2.48 U3.8 U3.13 | length 171
  L1(Signal) w0.25: 94,94 U2.1 ; U2.48 95.25,95.25
  L1(Signal) w0.3: 86.66,103.509 88.09,103.509 88.25,103.48 88.41,103.32 88.705,103.32 88.91,103.115 88.91,102.676 89.086,102.5 U3.8 ; U3.13@90.389,99.733 90.389,99.336 90.475,99.25 90.475,99.205 90.57,99.11 C15.1 90.534,98.417 90.509,98.34 90.509,98.297 ccw(c90.809,98.297) 90.661,98.036 90.928,97.885 ccw(c91.1,98.19) 91.088,97.84 92.221,97.801 ccw(c92.25,98.5) 92.287,97.801 95.716,97.985 ; 90.499,73.935 90.499,79.075 J3.1 90.625,82.875 cw(c90.75,82.875) 90.708,82.993 ccw(c90.609,83.276) 90.808,83.052 92.899,84.91 ccw(c92.7,85.135) 93,85.135 C9.1@93,89.41 ; C9.1 C9.1@93,89.41 ; 93.75,94 94,94 ; U2.9 93.836,90 93.66,89.824 93.66,89.775 93.455,89.57 93.16,89.57 C9.1@93,89.41 ; 95,95.5 95.25,95.25 ; 95.717,97.985 ccw(c95.7,98.284) 96,98.284 96,100.95 cw(c96.3,100.95) 96.3,101.25 R4.2 ; 100.25,105.506 100.25,105.7 ; 100.25,105.701 cw(c100.55,105.7) 100.55,106 103.731,106 ; 100.5,82 101.248,84.742 ; U2.24 100.75,87.625 100.775,87.6 101,87.6 101.1,87.5 101.25,87.5 101.5,87.25 C10.1 101.5,86.09 101.5,85.548 cw(c101.2,85.548) 101.485,85.455 ; 101.248,84.743 cw(c101.537,84.663) 101.253,84.758 101.485,85.454 ; U2.36 101.625,94 101.868,94.243 101.868,94.468 102.08,94.68 C11.1 102.91,94.75 104.895,94.75 ccw(c104.895,95.05) 105.082,94.816 108.637,97.66 ccw(c108.45,97.894) 108.75,97.894 108.75,100.624 cw(c109.05,100.624) 108.84,100.839 109.627,101.608 J2.1 109.627,102.433 109.35,104.4 R7.2@109.266,104.6 ; 103.732,106 ccw(c103.731,106.3) 103.741,106 103.761,106.001 ; 103.762,106.001 109.266,106.001 R7.2@109.266,104.6 ; 109.266,106.002 ccw(c109.565,105.99) 109.265,105.99 109.266,105.805 R7.2@109.266,104.6 ; C4.1 109.5,77.776 109.676,77.6 D1.2
  L1(Signal) w0.4: 95,95.5 95,96.18 C12.1
  L1(Signal) w0.5: 84.975,84.477 cw(c85,84.976) 84.5,84.976 84.5,94.75 ; 84.976,84.477 86.592,84.399 cw(c86.568,83.9) 87.068,83.886 87,81.507 ccw(c87.5,81.493) 87,81.493 87,74.491 ccw(c87.5,74.491) 87.49,73.991 90.499,73.935 99.991,73.759 ccw(c100,74.259) 100.5,74.259 100.5,82 ; v1(89.25,98.25) 90.487,98.44 90.49,98.44 C15.1 ; v1(91.25,96) C7.1 ; C8.1 93,93.95 92.499,94.451 C7.1 ; C8.1@93,93.94 93.06,94 93.75,94 ; 100.249,105.506 93.005,105.55 ccw(c93,104.75) 92.993,105.55 87.075,105.5 ccw(c87.079,105) 86.584,104.929 86.584,104.927 86.679,104.284 cw(c84.75,104) 86.69,103.798 86.66,103.509 86.497,101.948 cw(c86,102) 86,101.5 85,101.5 ccw(c85,101) 84.5,101 84.5,94.75 ; 100.25,105.506 100.753,105.503 ; 100.643,74.4 ccw(c101,74.75) 101,74.25 102.75,74.25 ccw(c102.75,74.75) 103.25,74.75 103.25,75.83 U1.4 ; 100.754,105.503 cw(c100.75,105.003) 101.25,105.003 R3.2 ; 84.5,94.75 90.997,94.75 C7.1
  Layer4(Signal) w0.5: v1(89.25,98.25) v1(91.25,96)
+5: C2.1 C3.1 FB1.2 U1.3
GND: C1.2 C2.2 C3.2 C4.2 C5.1 C6.1 C7.2 C8.2 C9.2 C10.2 C11.2 C12.2 C13.2 C14.2 C15.2 C16.2 C17.2 C18.2 J1.5 J2.5 J3.6 J3.7 J3.8 R1.1 R5.1 R6.1 U1.1 U2.8 U2.23 U2.35 U2.47 U2.49 U3.1 U3.9 U3.11 U3.25 Y1.2 Y1.4 | length 38.2
  L1(Signal) w0.3: v1(87.5,100.5) 88.09,100.5 C16.2 ; v1(87.75,87.5) 88.25,87.5 Y1.4 ; v1(87.75,89.25) C5.1 ; C16.2@88.25,100.59 88.41,100.75 88.75,100.75 89,101 U3.11 ; C17.2@88.25,102.62 88.87,102 U3.9 ; v1(88.75,75) 88.75,76.55 cw(c88.775,76.55) J3.7 ; v1(90.25,88.75) C6.1 ; v2(91.2,101.2) v2(92.3,101.2) ; v1(91.25,84.75) 91.25,85.475 Y1.2 ; C9.2 93,90.27 93.23,90.5 U2.8 ; U3.1 v1(93,104.75) ; v1(95,99) C18.2 ; U2.47 95.75,95.5 95.75,96.09 95.91,96.25 C12.2 v1(96,96.75) ; v1(96.75,81.25) 96.75,79.9 ccw(c96.875,79.9) J3.6 ; R6.1 v1(97.5,100) ; J3.8 cw(c98.725,76.55) 98.75,76.55 v1(98.75,74.75) ; U2.23 100.25,87 100.46,86.79 100.46,86.41 100.62,86.25 C10.2 ; U2.35 102.45,93.5 102.75,93.8 C11.2 ; v1(102.25,87.25) R5.1 ; v1(109.5,81.25) C4.2 111.413,80.45 111.738,80.775 R1.1 v1(111.75,81.5)
  L1(Signal) w0.5: v1(87.5,102.5) 87.538,102.538 87.842,102.538 87.914,102.61 88.22,102.61 C17.2 ; v1(90,93) 90.997,93 C7.2 91.26,93.06 92.99,93.06 C8.2 ; C15.2 v1(92.25,98.5) ; v1(105.273,104.9) 105.56,104.56 C14.2 ; C3.2 v1(106.25,85) ; v1(107,84) 107,82.835 ccw(c107.04,82.835) U1.1 ; v1(107.25,86.25) C2.2 ; v1(109.5,86.25) C1.2 ; v1(111.25,93.75) cw(c111.3,93.75) 111.3,93.8 J1.5
  other v2: 95.8,89.05 96.9,89.05 98,89.05 99.1,89.05 100.2,89.05 95.8,90.15 96.9,90.15 98,90.15 99.1,90.15 100.2,90.15 95.8,91.25 96.9,91.25 98,91.25 99.1,91.25 100.2,91.25 95.8,92.35 96.9,92.35 98,92.35 99.1,92.35 100.2,92.35 95.8,93.45 96.9,93.45 98,93.45 99.1,93.45 100.2,93.45 91.2,102.3 92.3,102.3
IMU_CPOUT: C18.1 U3.20 | length 1.7
  L1(Signal) w0.3: U3.20 94.824,101 94.84,100.984 94.84,100.59 C18.1
IMU_INT: U2.45 U3.12 | length 14.5
  L1(Signal) w0.3: U3.12 89.5,100.5 89.5,100.225 88.574,99.299 88.574,98.469 cw(c88.274,98.469) 88.567,98.404 ccw(c89.25,98.25) 88.567,98.096 cw(c88.274,98.031) 88.574,98.031 88.574,97.676 88.75,97.5 90.514,97.5 ; 90.516,97.5 cw(c90.513,97.2) 90.656,97.464 90.695,97.442 ccw(c91.1,98.19) 91.07,97.341 92.208,97.301 ccw(c92.25,98.5) 92.314,97.302 96.126,97.5 cw(c96.142,97.2) 96.142,97.5 96.5,97.5 96.75,97.25 U2.45
IMU_REGOUT: C16.1 U3.10 | length 1.6
  L1(Signal) w0.3: C16.1 88.32,101.5 U3.10
IMU_SCL: R3.1 U2.42 U3.23 | length 15
  L1(Signal) w0.254: v1(99.75,102.5) 100,102.5 100.225,102.275 R3.1
  L1(Signal) w0.3: U3.23 v1(97.5,102.5) ; U2.42 98.25,95.5 99.5,96.75 99.5,99.25 100.225,99.975 R3.1
  Layer4(Signal) w0.3: v1(97.5,102.5) v1(99.75,102.5)
IMU_SDA: R4.1 U2.43 U3.24 | length 13.8
  L1(Signal) w0.3: U3.24 97.01,103 97.21,103.2 97.79,103.2 97.99,103 98.5,103 98.75,102.75 R4.1 98.75,97.75 97.75,96.75 U2.43
LED_PWR_K: D1.1 R1.2 | length 1.3
  L1(Signal) w0.3: D1.1 R1.2
"MCU BOOT0": R6.2 U2.44 | length 3.9
  L1(Signal) w0.3: U2.44 97.25,98.25 97.488,98.487 R6.2
"MCU NRST": C14.1 J2.3 R7.1 U2.7 | length 36.7
  L1(Signal) w0.2: v3(92,90.75) 92.25,91 U2.7 ; v1(104.198,104.166) 104.623,105.169 105.004,105.55 105.542,105.55 106.383,105.549 106.5,105.431 C14.1 106.5,102.75 107.23,102.02 J2.3 108.1,104.35 R7.1
  Layer4(Signal) w0.2: v3(92,90.75) 93.75,92.5 93.75,96.383 93.867,96.5 95.279,96.5 cw(c95.279,96.3) 95.449,96.406 ccw(c96,96.75) 96.552,96.407 cw(c96.721,96.3) 96.721,96.5 101.75,96.5 102.75,97.5 102.75,104.133 102.867,104.25 104.114,104.25 v1(104.198,104.166)
"MCU VCAP1": C13.1 U2.22 | length 3.5
  L1(Signal) w0.3: C13.1@99.451,84.5 99.5,84.549 99.5,87.153 99.725,87.378 99.725,87.825 U2.22
MCU_LED_A: D2.2 U2.26 | length 1.9
  L1(Signal) w0.3: U2.26 D2.2
MCU_LED_K: D2.1 R5.2 | length 1.8
  L1(Signal) w0.3: R5.2 104.013,87.263 104.15,87.4 D2.1
MCU_OSC_IN: C5.2 U2.5 Y1.1 | length 14.7
  L1(Signal) w0.2: Y1.1 88.45,86.375 87.438,86.93 cw(c87.75,87.5) 87.54,88.115 88.253,88.359 cw(c88.35,88.075) 88.335,88.375 89.419,88.429 ccw(c89.409,88.628) 89.551,88.769 ; 89.55,88.77 C5.2 89.07,91.883 89.187,92 U2.5
MCU_OSC_OUT: R2.1 U2.6 | length 3.8
  L1(Signal) w0.2: R2.1@91.172,90.75 91.172,90.771 91.901,91.5 U2.6
MCU_PA4: J3.2 U2.14 | length 9.7
  L1(Signal) w0.2: 95.75,86.25 U2.14
  L1(Signal) w0.3: J3.2 91.875,82.375 95.75,86.25
MCU_PA5: J3.3 U2.15 | length 9.4
  L1(Signal) w0.3: J3.3 93.125,82.875 96.25,86 U2.15
MCU_PA6: J3.4 U2.16 | length 9.1
  L1(Signal) w0.3: J3.4 94.375,83.418 96.75,85.793 96.75,86 U2.16
MCU_PA7: J3.5 U2.17 | length 8.9
  L1(Signal) w0.3: J3.5 95.5,79.9 95.5,83.75 97.25,85.5 97.25,86 U2.17
MCU_SWCLK: J2.4 U2.37 | length 10.3
  L1(Signal) w0.3: U2.37 100.75,95.5 101.25,96 105.75,96 107.25,97.5 107.25,99.23 J2.4
MCU_SWDIO: J2.2 U2.34 | length 12
  L1(Signal) w0.3: U2.34 104.75,93 109.955,98.205 109.955,99.395 J2.2
MCU_SWO: J2.6 U2.39 | length 8.1
  L1(Signal) w0.3: U2.39 99.75,96.25 102.98,99.48 J2.6
USB_D_N: J1.2 U2.32 | length 10.9
  L1(Signal) w0.26: U2.32 111.558,92 111.613,91.945 112.095,91.945 J1.2@112.19,91.85
USB_D_P: J1.3 U2.33 | length 11.1
  L1(Signal) w0.26: U2.33 101.405,92.505 101.67,92.505 101.685,92.52 106.98,92.52 107,92.5 J1.3
VBUS: C1.1 FB1.1 J1.1
"XTAL IN": C6.2 R2.2 Y1.3 | length 3.8
  L1(Signal) w0.2: R2.2 89.975,90.737 90.91,89.803 90.91,89.41 C6.2 91.07,87.68 Y1.3
pads on no net: J1.4 J1.6 J1.7 J1.8 J1.9 J1.10 J1.11 U2.2 U2.3 U2.4 U2.10 U2.11 U2.12 U2.13 U2.18 U2.19 U2.20 U2.21 U2.25 U2.27 U2.28 U2.29 U2.30 U2.31 U2.38 U2.40 U2.41 U2.46 U3.2 U3.3 U3.4 U3.5 U3.6 U3.7 U3.14 U3.15 U3.16 U3.17 U3.18 U3.19 U3.21 U3.22
copper on no net: | length 134.3
  L1(Signal) w0.254: 82,75.52 ccw(c85.066,75.52) 82.898,73.352 ccw(c84.351,74.805) 84.351,72.75 115.23,72.75 ccw(c115.23,74.02) 116.5,74.02 116.5,105.48 ccw(c115.23,105.48) 115.23,106.75 83.27,106.75 ccw(c83.27,105.48) 82,105.48 82,104.75 82,75.52
  other v1: 107.044,73.928 104.5,74 109.75,73.992 114.325,73.992 111.941,74.121 83.25,78 84.75,78 113.359,78.631 83.25,79.75 84.75,80 113.5,80.25 114.905,80.564 84.621,81.209 83.25,81.5 98.5,82.5 113.165,82.562 114.841,82.82 84.75,83.25 109.299,83.464 110.91,83.464 83.25,83.5 113.101,84.43 114.841,84.43 110.459,84.946 108.5,85 83,85.5 112.972,86.106 114.841,86.299 86.361,86.75 82.75,87.75 82.75,89.75 86.361,90.036 82.75,92.5 86.361,92.936 107.689,93.967 109.622,93.967 82.877,94.018 108.977,95.642 82.996,95.89 86.554,96.351 112.714,97.897 114.647,97.962 86.75,98 82.916,98.321 114.712,99.25 112.65,99.895 86.168,100.152 82.837,100.393 115.227,101.505 112.908,101.699 114.39,101.828 99.57,103.31 111.104,104.34 99.57,104.534 96.928,104.663 110.846,105.629 113.037,105.887

## Polygon pours and split planes (outlines as drawn)
+3V3 on L1(Signal) "+3V3_L01_P003" (solid, pour order 3): 110.437,78.562 110.25,78.375 110.25,78 106.75,78 106.75,75.75 106.5,75.5 102.75,75.5 102.75,77 104.25,77 104.25,82 104,82.25 104,83.5 105.5,83.5 105.5,79.25 108.5,79.25 108.75,79 110.25,79 110.25,78.75
+5 on L1(Signal) "+5_L01_P001" (solid, pour order 1): 106.25,88.625 104.75,87.125 104.75,86.5 104.25,86.5 103.75,86 103,86 103,84.25 102.5,83.75 102,83.75 101.5,83.25 101.5,82 103.25,82 103.25,84 103.5,84.25 104,84.25 104,85.75 104.5,85.75 105.25,86.5 105.25,87.25 106.25,88.25 106.5,88 108,88 108.5,88.5 108.5,91.25 107.25,91.25 107.25,90 106.25,89
VBUS on L1(Signal) "VBUS_L01_P000" (solid, pour order 0): 108.75,91.5 108.75,88 110.25,88 110.25,90.75 110.5,91 113.25,91 113.25,91.5 111.75,91.5
no net on L2(GND) "NONET_L02_P007" (solid, pour order 7): 82.5,75.79 ccw(c85.04,75.79) 85.04,73.25 114.25,73.25 ccw(c114.25,75) 116,75 116,104.75 ccw(c114.5,104.75) 114.5,106.25 85.04,106.25 ccw(c85.04,103.71) 82.5,103.71
no net on L3 (GND) "NONET_L03_P008" (solid, pour order 8): 82.5,75.79 ccw(c85.04,75.79) 85.04,73.25 114.25,73.25 ccw(c114.25,75) 116,75 116,104.75 ccw(c114.5,104.75) 114.5,106.25 85.04,106.25 ccw(c85.04,103.71) 82.5,103.71

## Other copper
L1(Signal):
  text "SWD" at 103.504,97.004 h1
  text "USB" at 111.754,87.004 h1
  text "GPIO" at 87.75,81.011 h1